# Altium PCB demo_dermis_main_testboard_scratch.PcbDoc (part 7 of 7)
Units mm, origin at the board's own origin, x right, y up, seen from the top; angles counter-clockwise.
Board outline 348.67 x 247.5 mm, 4 copper layers (Top Layer, Layer 1, Layer 2, Bottom Layer), stack 0.603 mm thick; 416 components, 288 nets, 1934 pads, 1690 vias.
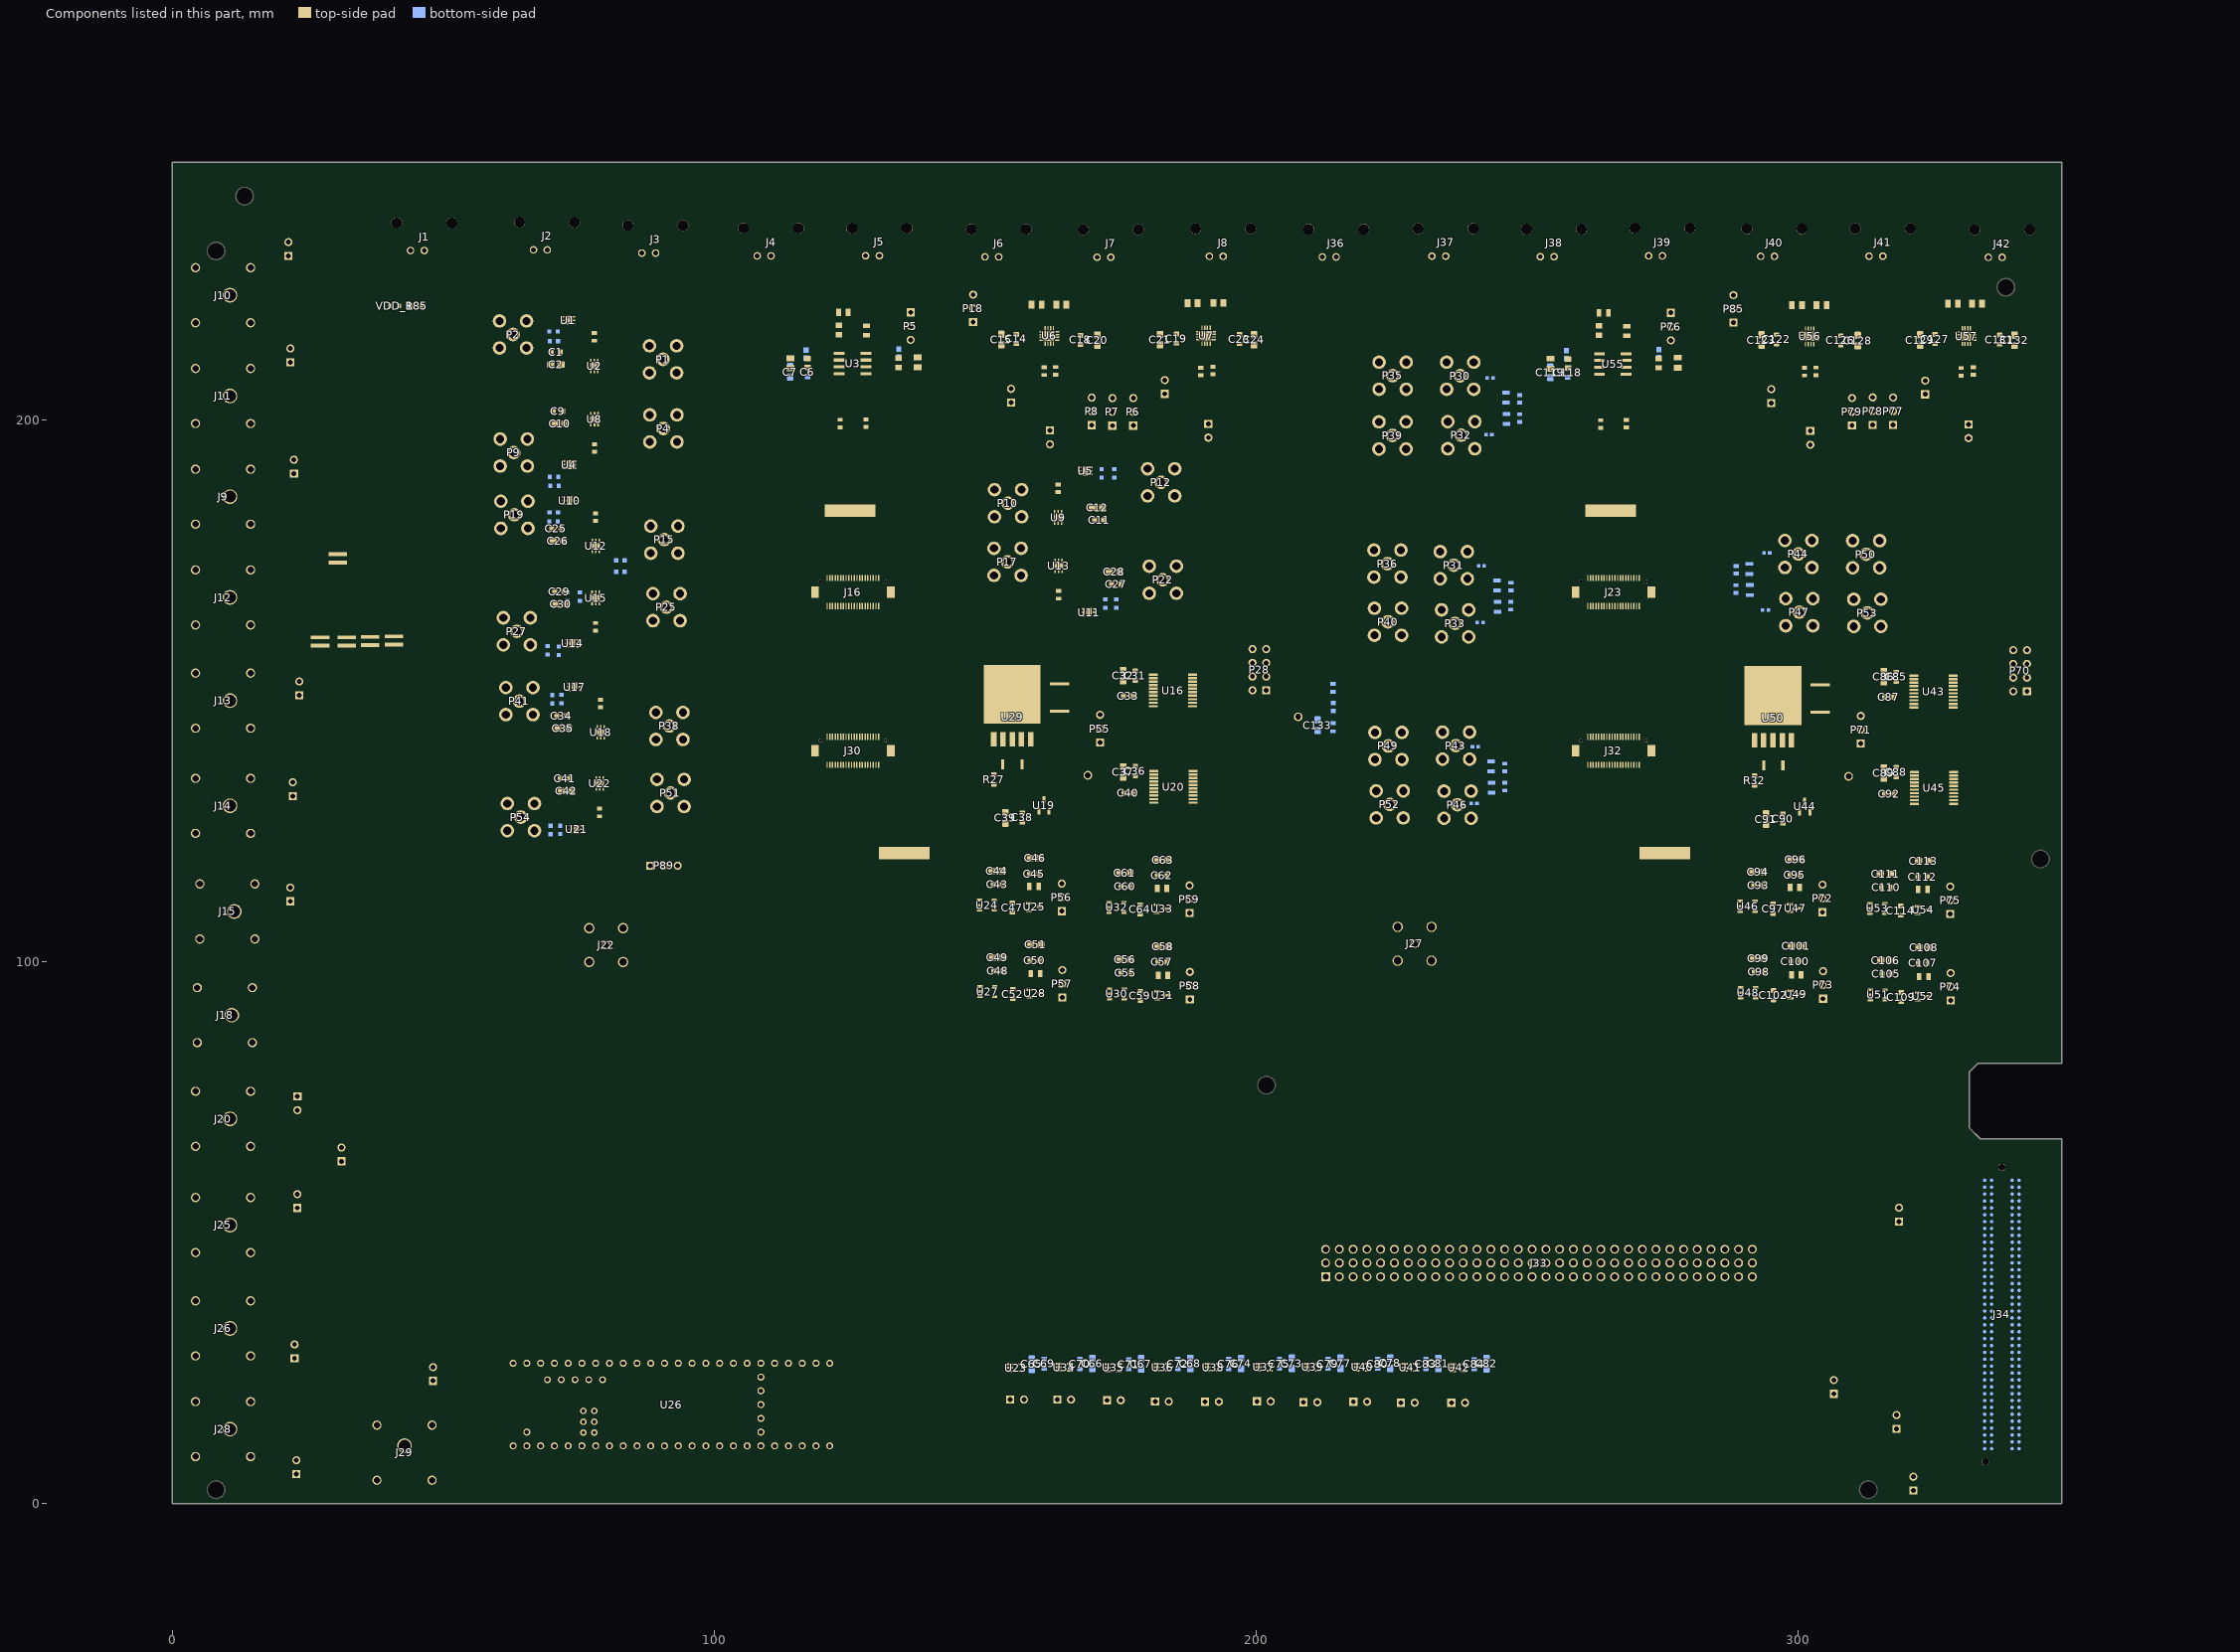
[diagram p8: the components of this part, seen from the top]

## Silkscreen, mask and mechanical layers (free items; w line width, h text height)
Top Overlay:
  drawing of 292 lines, arcs and shapes, not listed
  text "VINP_REPLICA" at 60.841,228.984 h1
  text "VIN_OTA (SINGLE-ENDED)" at 37.283,228.372 h1
  text "VINN_REPLICA" at 81.021,228.238 h1
  text "VOUTP_REPLICA_INAMP" at 267.115,227.808 h1
  text "VOUTN_REPLICA_INAMP" at 122.149,227.742 h1
  text "VOUTN_REPLICA_INAMP" at 287.876,227.721 h1
  text "VOUTP_REPLICA_INAMP" at 102.444,227.684 h1
  text "VINP_REPLICA" at 229.588,227.686 h1
  text "VOUTP_X0_INAMP" at 145.051,227.643 h1
  text "VOUTN_X0_INAMP" at 332.846,227.622 h1
  text "VOUTP_X0_INAMP" at 309.22,227.522 h1
  text "VOUTN_X0_INAMP" at 167.874,227.456 h1
  text "VINN_REPLICA" at 251.272,227.061 h1
  text "VIN_OTA (SINGLE-ENDED)" at 205.223,226.918 h1
  text "VDD_5V_IN" at 23.918,224.898 h2.5
  text "VOCM_IN / (CMRR)" at 193.139,224.544 h1
  text "VN_Y1" at 86.123,216.225 h2.5
  text "VINN_Y1" at 214.317,216.121 h2.5
  text "VN_Y1" at 232.92,215.681 h2.5
  text "CHIPA_VCM" at 142.586,215.349 h1
  text "CHIPA_VCM" at 282.859,215.27 h1
  text "VOCM  / (IN)" at 138.729,211.019 h1
  text "VOCM  / (IN)" at 278.994,210.66 h1
  text "VINN_Y1" at 51.758,208.57 h2.5
  text "VNEG (-5V)" at 27.491,207.194 h2.5
  text "VOUTN_X0" at 179.669,202.105 h1
  text "VOUTN_X0" at 319.942,202.026 h1
  text "VOUTN_REPLICA" at 140.546,201.644 h1
  text "VINP_Y1" at 55.116,201.581 h2.5
  text "VOUTN_REPLICA" at 280.819,201.565 h1
  text "VOUTP_REPLICA" at 148.566,197.299 h1
  text "VOUTP_REPLICA" at 288.839,197.22 h1
  text "A0" at 168.261,195.926 h1.5
  text "A2" at 176.255,195.872 h1.5
  text "A0" at 308.534,195.847 h1.5
  text "A1" at 172.378,195.792 h1.5
  text "A2" at 316.527,195.793 h1.5
  text "A1" at 312.651,195.713 h1.5
  text "VOUTP_X0" at 190.254,193.724 h1
  text "VOUTP_X0" at 330.527,193.646 h1
  text "VP_Y1" at 85.871,191.223 h2.5
  text "VINP_Y1" at 215.558,189.2 h2.5
  text "VP_Y1" at 233.542,189.193 h2.5
  text "VN_X0" at 147.184,189.018 h2.5
  text "VDD_3P3V_IN" at 27.644,187.717 h2.5
  text "VINN_X0" at 307.755,183.01 h2.5
  text "VN_X0" at 292.477,182.792 h2.5
  text "VN_X1" at 85.94,182.757 h2.5
  text "VINN_X1" at 216.675,181.392 h2.5
  text "VN_X1" at 235.253,181.392 h2.5
  text "VINN_X0" at 174.043,180.916 h2.5
  text "PCB_AGND" at 21.28,179.607 h1.5
  text "VINP_X0" at 174.941,176.066 h2.5
  text "VINN_X1" at 53.176,175.861 h2.5
  text "GND" at 19.786,168.568 h2.5
  text "VP_X0" at 147.389,166.662 h2.5
  text "VINP_X1" at 53.416,165.687 h2.5
  text "VDAC_RESERVED1" at 342.515,159.697 h0.9 r90
  text "VP_X1" at 87.16,158.205 h2.5
  text "VDAC_RESERVED0" at 203.626,157.177 h0.9
  text "VINP_X0" at 309.392,156.6 h2.5
  text "VP_X0" at 293.023,156.273 h2.5
  text "VINP_X1" at 217.27,155.883 h2.5
  text "VTRIG_COMP" at 204.168,154.565 h0.9
  text "VTRIG_COMP" at 345.242,154.508 h0.9 r90
  text "VP_X1" at 232.499,154.441 h2.5
  text "VTUNE_PSEUDO" at 203.977,152.008 h0.9
  text "VSS" at 36.551,150.46 h1.5 r90
  text "AGND" at 26.15,150.382 h1.5 r90
  text "DGND" at 31.191,150.33 h1.5 r90
  text "VCM" at 204.13,149.604 h0.9
  text "VTUNE_PSEUDO" at 346.44,149.053 h0.9 r90
  text "VN_Y0" at 86.867,148.378 h2.5
  text "VINN_Y0" at 216.898,147.706 h2.5
  text "VN_Y0" at 235.701,147.37 h2.5
  text "VDAC  / (extra)" at 168.846,146.954 h1
  text "VDAC  / (extra)" at 309.207,146.753 h1
  text "VCM" at 343.513,146.725 h0.9
  text "VREF" at 172.698,144.702 h1
  text "VREF" at 313.059,144.501 h1
  text "VINN_Y0" at 55.27,141.841 h2.5
  text "VDD_DIG_6V" at 20.647,139.936 h2.5
  text "LDO" at 172.79,139.78 h1
  text "LDO" at 313.15,139.579 h1
  text "DIVIDER / (1.5V)" at 207.478,137.872 h0.9
  text "VINP_Y0" at 54.022,131.655 h2.5
  text "VP_Y0" at 85.99,124.168 h2.5
  text "VDD_IO_3P3V" at 20.609,121.228 h2.5
  text "VINP_Y0" at 214.824,120.936 h2.5
  text "VP_Y0" at 232.809,120.93 h2.5
  text "VCM" at 79.608,116.737 h2
  text "IBIAS" at 190.536,109.496 h1 r90
  text "IBIAS" at 330.897,109.295 h1 r90
  text "IBIAS_SLEW" at 166.885,105.586 h1 r90
  text "IBIAS_SLEW" at 307.246,105.385 h1 r90
  text "EXTERNAL / SENSORS" at 268.843,103.658 h2
  text "VDD_DIG_3V" at 21.267,102.063 h2.5
  text "EXTERNAL  / DIGITAL / CAPACITORS" at 128.957,100.475 h2
  text "CLK" at 221.789,99.693 h2.5 r90
  text "CLK" at 72.738,99.443 h2.5 r90
  text "IBIAS_AFE" at 167.054,90.727 h1 r90
  text "IBIAS_AFE" at 307.414,90.526 h1 r90
  text "CHIPA" at 69.721,89.785 h5
  text "IBIAS_ADAPT" at 190.353,89.552 h1 r90
  text "IBIAS_ADAPT" at 330.714,89.351 h1 r90
  text "CHIPB" at 216.363,88.884 h5
  text "VDD_TDIG_3V" at 21.34,82.284 h2.5
  text "Pragmatic Chip (rev1): May '24  PCB: August '24" at 289.358,71.548 h1.5 r359.52
  text "VDD_ADC_3V" at 35.205,64.371 h2.5
  text "D" at 338.956,64.267 h1
  text "C" at 340.663,64.267 h1
  text "H" at 333.756,64.22 h1
  text "G" at 335.257,64.204 h1
  text "1" at 346.146,59.229 h1
  text "DIGITAL  / TEST / (FPGA)" at 305.551,52.308 h1.5
  text "CHIPB" at 204.146,46.256 h1.5
  text "VDD_AFE_3V" at 21.983,44.866 h2.5
  text "CHIPA" at 204.061,41.209 h1.5
  text "VD" at 271.789,38.647 h0.9 r90
  text "VG" at 269.333,38.59 h0.9 r90
  text "VS" at 266.623,38.506 h0.9 r90
  text "SDI" at 264.126,38.098 h0.9 r90
  text "RST" at 213.191,38.051 h0.9 r90
  text "ACK" at 215.806,38.02 h0.9 r90
  text "GND" at 280.203,37.543 h1.5 r0.14
  text "SCLK" at 261.534,37.022 h0.9 r90
  text "REQON" at 218.207,36.158 h0.9 r90
  text "DIG_RES / leave open" at 240.503,35.998 h1 r0.14
  text "LDACb" at 253.721,35.692 h0.9 r90
  text "ADDRX0" at 223.477,35.662 h0.9 r90
  text "REQOFF" at 220.822,35.552 h0.9 r90
  text "ADDRY0" at 225.581,35.561 h0.9 r90
  text "RESETb" at 251.287,35.479 h0.9 r90
  text "AER_DIS" at 228.393,34.896 h0.9 r90
  text "GAIN_HI" at 238.492,34.874 h0.9 r90
  text "CT_MODE" at 235.956,34.337 h0.9 r90
  text "CSb_IDAC" at 258.922,34.179 h0.9 r90
  text "CSb_VDAC" at 256.401,33.714 h0.9 r90
  text "VD" at 21.053,33.125 h2.5
  text "RATIOMODE1" at 233.698,32.587 h0.9 r90
  text "RATIOMODE0" at 230.991,32.37 h0.9 r90
  text "0" at 64.372,27.878 h1.5
  text "GND" at 60.664,27.788 h1
  text "VS" at 40.611,20.536 h2.5
  text "12V(FPGA)" at 292.103,20.164 h1.5
  text "ADDRY0" at 199.211,14.467 h0.9
  text "RST" at 154.902,14.23 h0.9
  text "ADDRX0" at 189.271,14.169 h0.9
  text "DIG_RES2" at 224.54,14.141 h0.9
  text "ACK" at 163.151,14.112 h0.9
  text "REQON" at 172.4,14.112 h0.9
  text "DIG_RES3" at 233.731,14.115 h0.9
  text "REQOFF" at 180.275,13.962 h0.9
  text "DIG_RES1" at 216.601,13.644 h0.9
  text "DIG_RES0" at 207.266,13.199 h0.9
  text "VG" at 21.157,12.318 h2.5
  text "Zedboard FMC" at 328.37,12.188 h3 r90
  text "DERMIS" at 243.249,10.39 h17.6 r359.79
  text "3.3V(FPGA)" at 310.038,10.305 h1.5
  text "40" at 345.956,9.851 h1
  text "GND" at 97.197,7.782 h1
  text "mark.alea@kuleuven.be" at 257.618,6.136 h2.24 r0.14
  text "VADJ (FPGA)" at 305.69,5.98 h1.5
  text "Arduino Teensy 4.1" at 69.551,3.223 h3
Bottom Overlay:
  text "<< USB / SIDE" at 59.401,22.867 h1.52

## Text inside footprints (layer, text, board x,y; h text height)
P28: Top Overlay "2" at 199.824,147.535 h1.27 r90; Top Overlay "1" at 202.364,148.043 h1.27 r90; Top Overlay "7" at 202.364,159.219 h1.27 r90; Top Overlay "8" at 199.824,159.219 h1.27 r90
P70: Top Overlay "2" at 340.185,147.334 h1.27 r90; Top Overlay "1" at 342.725,147.842 h1.27 r90; Top Overlay "7" at 342.725,159.018 h1.27 r90; Top Overlay "8" at 340.185,159.018 h1.27 r90
U3: Top Overlay "*" at 122.497,212.723 h1.27; Mechanical 13 "*" at 122.497,212.723 h1.27
U6: Top Overlay "*" at 161.468,212.668 h1.27 r90; Mechanical 13 "*" at 161.468,214.116 h1.27 r90
U7: Top Overlay "*" at 190.387,212.724 h1.27 r90; Mechanical 13 "*" at 190.387,214.172 h1.27 r90
U16: Top Overlay "*" at 180.417,153.29 h1.27; Mechanical 13 "*" at 181.89,152.461 h1.27
U20: Top Overlay "*" at 180.523,135.505 h1.27; Mechanical 13 "*" at 181.996,134.676 h1.27
U23: Top Overlay "*" at 154.018,25.95 h1.27; Mechanical 13 "*" at 154.018,25.95 h1.27
U24: Top Overlay "*" at 148.371,111.761 h1.27; Mechanical 13 "*" at 149.365,110.796 h1.27
U26: Mechanical 13 "Teensy 4.1" at 91.866,17.93 h1.27 r180
U27: Top Overlay "*" at 148.472,95.81 h1.27; Mechanical 13 "*" at 149.466,94.844 h1.27
U29: Top Overlay "*" at 149.775,140.422 h1.27; Mechanical 13 "*" at 151.261,143.877 h1.27
U30: Top Overlay "*" at 172.369,95.401 h1.27; Mechanical 13 "*" at 173.363,94.435 h1.27
U32: Top Overlay "*" at 172.304,111.35 h1.27; Mechanical 13 "*" at 173.298,110.385 h1.27
U34: Top Overlay "*" at 162.974,26.017 h1.27; Mechanical 13 "*" at 162.974,26.017 h1.27
U35: Top Overlay "*" at 172.027,25.963 h1.27; Mechanical 13 "*" at 172.027,25.963 h1.27
U36: Top Overlay "*" at 181.087,26.012 h1.27; Mechanical 13 "*" at 181.087,26.012 h1.27
U37: Top Overlay "*" at 199.829,26.057 h1.27; Mechanical 13 "*" at 199.829,26.057 h1.27
U38: Top Overlay "*" at 190.456,26.012 h1.27; Mechanical 13 "*" at 190.456,26.012 h1.27
U39: Top Overlay "*" at 208.79,26.052 h1.27; Mechanical 13 "*" at 208.79,26.052 h1.27
U40: Top Overlay "*" at 217.959,26.062 h1.27; Mechanical 13 "*" at 217.959,26.062 h1.27
U41: Top Overlay "*" at 226.807,26.001 h1.27; Mechanical 13 "*" at 226.807,26.001 h1.27
U42: Top Overlay "*" at 235.736,25.972 h1.27; Mechanical 13 "*" at 235.736,25.972 h1.27
U43: Top Overlay "*" at 320.778,153.089 h1.27; Mechanical 13 "*" at 322.251,152.26 h1.27
U45: Top Overlay "*" at 320.883,135.304 h1.27; Mechanical 13 "*" at 322.357,134.475 h1.27
U46: Top Overlay "*" at 288.731,111.56 h1.27; Mechanical 13 "*" at 289.725,110.595 h1.27
U48: Top Overlay "*" at 288.832,95.609 h1.27; Mechanical 13 "*" at 289.826,94.643 h1.27
U50: Top Overlay "*" at 290.136,140.221 h1.27; Mechanical 13 "*" at 291.621,143.676 h1.27
U51: Top Overlay "*" at 312.73,95.199 h1.27; Mechanical 13 "*" at 313.724,94.234 h1.27
U53: Top Overlay "*" at 312.664,111.149 h1.27; Mechanical 13 "*" at 313.658,110.184 h1.27
U55: Top Overlay "*" at 262.77,212.644 h1.27; Mechanical 13 "*" at 262.77,212.644 h1.27
U56: Top Overlay "*" at 301.741,212.589 h1.27 r90; Mechanical 13 "*" at 301.741,214.037 h1.27 r90
U57: Top Overlay "*" at 330.659,212.645 h1.27 r90; Mechanical 13 "*" at 330.659,214.093 h1.27 r90